# EAGLE board SSTuino_Evo (EAGLE 9.6.2)
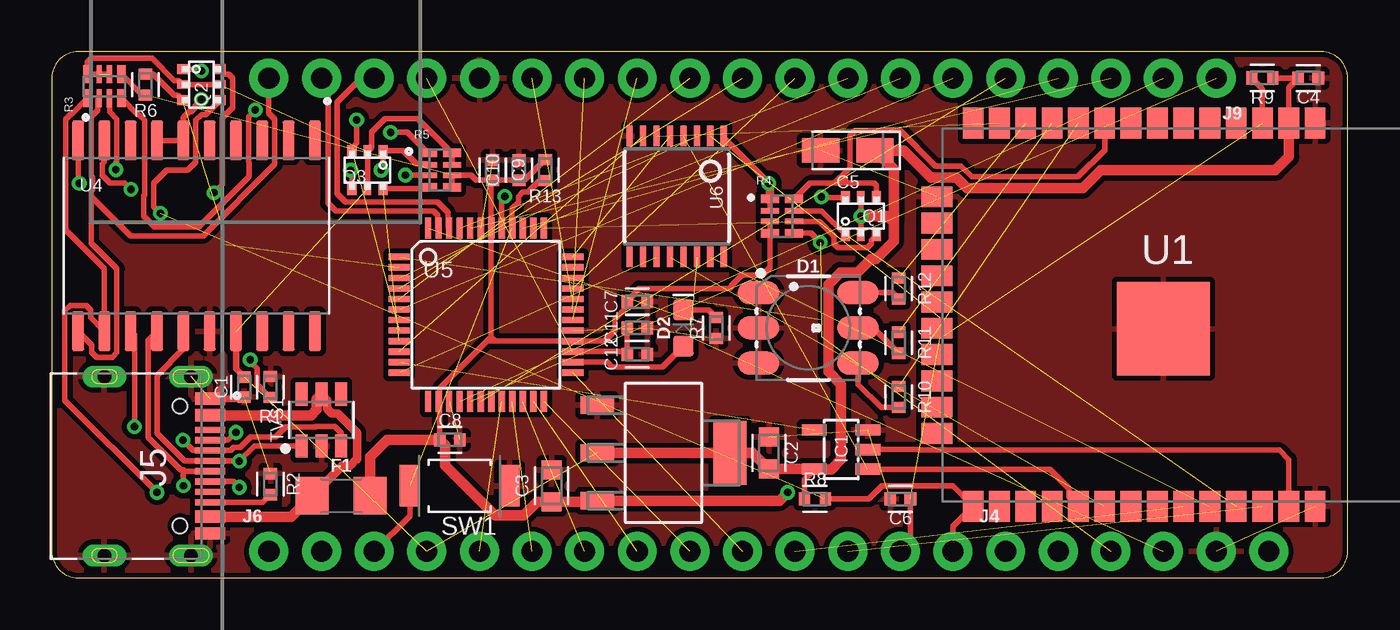
[diagram p0: board, top side]
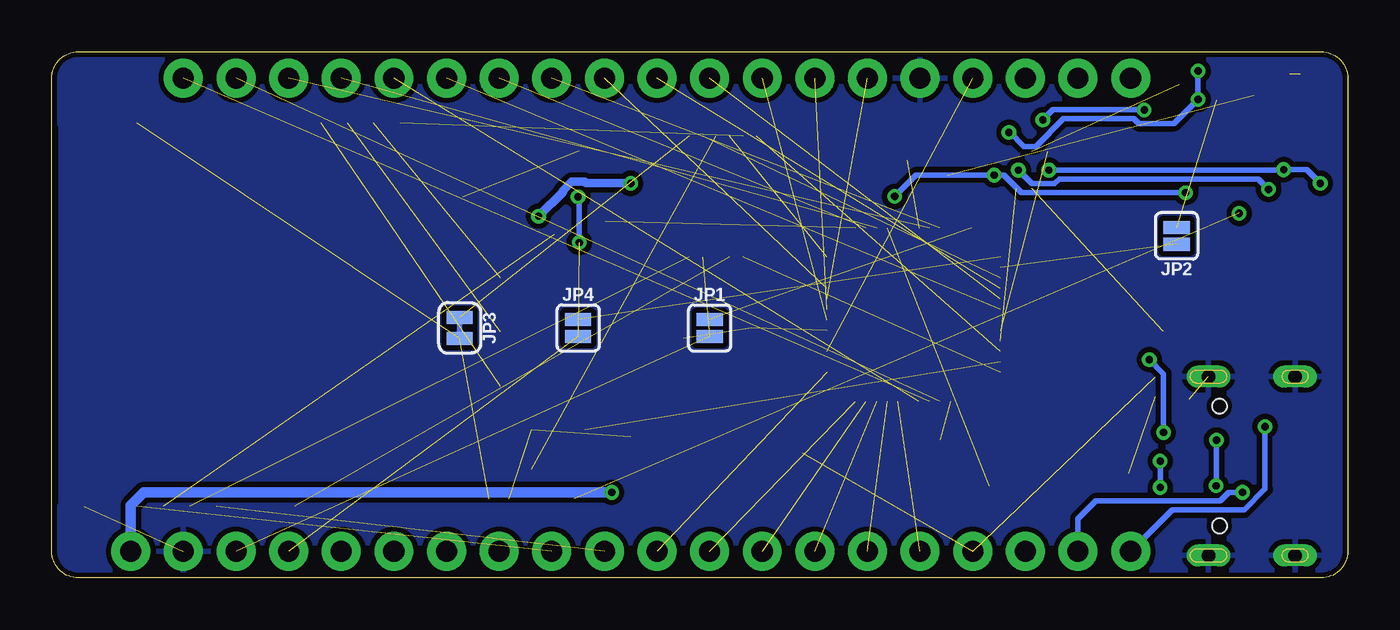
[diagram p1: board, bottom side, seen from below]

Size 62.55 x 25.4 mm. Coordinates in mm from the lower left corner, seen from the top.
Outline: 0,24.13 0,1.27 arc90 1.27,0 61.28,0 arc90 62.55,1.27 62.55,24.13 arc90 61.28,25.4 1.27,25.4 arc90 0,24.13
Copper layers (1*16): Top 0.035mm / dielectric 1.5mm / Bottom 0.035mm
Design rules "SparkFun-2-Layer-General-JLCPCB": minimum track width 7mil, minimum drill 0.3mm, track to track 7mil, track to pad 7mil, pad to pad 7mil, via to via 7mil, smd to smd 7mil, copper to edge 7mil, drill to drill 7mil, minimum pad ring 7mil, minimum via ring 7mil, stop-mask expansion 3mil, vias tented up to drill 25mil, thermal gap 10mil
Net classes: 0 default: width 0.254 mm, drill 0.35 mm; 1 differential: width 0.254 mm

## Footprints (pad centres in the part's own frame; a part is rotated, then mirrored left to right if it is on the bottom)
ARDUINO_R3 = drill 1.016 pad 1.93: 3.3V 2.54,-24.13; 5V 5.08,-24.13; A0 17.78,-24.13; A1 20.32,-24.13; A2 22.86,-24.13; A3 25.4,-24.13; A4 27.94,-24.13; A5 30.48,-24.13; AREF -9.144,24.13; D0 30.48,24.13; D1 27.94,24.13; D2 25.4,24.13; D3 22.86,24.13; D4 20.32,24.13; D5 17.78,24.13; D6 15.24,24.13; D7 12.7,24.13; D8 8.636,24.13; D9 6.096,24.13; D10 3.556,24.13; D11 1.016,24.13; D12 -1.524,24.13; D13 -4.064,24.13; GND@1 7.62,-24.13; GND@2 10.16,-24.13; GND@3 -6.604,24.13; GND@4 33.16,-1.32; IOREF -2.54,-24.13; MISO 30.62,3.76; MOSI 33.16,1.22; NC -5.08,-24.13; RESET@1 0,-24.13; RESET@2 30.62,-1.32; SCK 30.62,1.22; SCL -14.224,24.13; SDA -11.684,24.13; VCC 33.16,3.76; VIN 12.7,-24.13 | hole 3.175: -17.78,24.13; 33.02,8.89; 33.02,-19.05; -19.05,-24.13
CAPC1005X60 = smd 0.56 x 0.629: 1 -0.485,0; 2 0.485,0
CAPC1608X85 = smd 0.921 x 0.97: 1 -0.775,0; 2 0.775,0
CAPMP3216X180N = smd 1.796 x 1.189: 1 -1.31,0; 2 1.31,0
LED-TRICOLOR-5050 = smd 2 x 1.1: 1 2.4,-1.7; 2 2.4,0; 3 2.4,1.7; 4 -2.4,1.7; 5 -2.4,0; 6 -2.4,-1.7
LED-0603 = smd 1 x 1: A -0.877,0; C 0.877,0
1206 = smd 1.6 x 1.8: 1 -1.4,0; 2 1.4,0
SOT23-5L = smd 0.55 x 1.2: 1 -0.95,-1.3; 2 0,-1.3; 3 0.95,-1.3; 4 0.95,1.3; 5 -0.95,1.3
1X06_NO_SILK = drill 1.016 pad 1.88: 1 0,0; 2 2.54,0; 3 5.08,0; 4 7.62,0; 5 10.16,0; 6 12.7,0
HRO_TYPE-C-31-M-12 = smd 0.6 x 1.45: A1B12 -3.25,5.095; A4B9 -2.45,5.095; B1A12 3.25,5.095; B4A9 2.45,5.095 | smd 0.3 x 1.45: A5 -1.25,5.095; A6 -0.25,5.095; A7 0.25,5.095; A8 1.25,5.095; B5 1.75,5.095; B6 0.75,5.095; B7 -0.75,5.095; B8 -1.75,5.095 | drill 0.65 pad 1.05 long: S1 -4.32,4.18; S2 4.32,4.18; S3 -4.32,0; S4 4.32,0 | hole 0.7: -2.89,3.65; 2.89,3.65
1X14_NO_SILK = drill 1.016 pad 1.88: 1 0,0; 2 2.54,0; 3 5.08,0; 4 7.62,0; 5 10.16,0; 6 12.7,0; 7 15.24,0; 8 17.78,0; 9 20.32,0; 10 22.86,0; 11 25.4,0; 12 27.94,0; 13 30.48,0; 14 33.02,0
1X19_NO_SILK = drill 1.016 pad 1.88: 1 0,0; 2 2.54,0; 3 5.08,0; 4 7.62,0; 5 10.16,0; 6 12.7,0; 7 15.24,0; 8 17.78,0; 9 20.32,0; 10 22.86,0; 11 25.4,0; 12 27.94,0; 13 30.48,0; 14 33.02,0; 15 35.56,0; 16 38.1,0; 17 40.64,0; 18 43.18,0; 19 45.72,0
SMT-JUMPER_2_NO_SILK = smd 0.635 x 1.27: 1 -0.406,0; 2 0.406,0
SMT-JUMPER_2_NC_TRACE_SILK = smd 0.635 x 1.27: 1 -0.508,0; 2 0.508,0
ARDUINO-TRANSISTORS_SOT363 = smd 0.5 x 0.6: 1 -0.75,-0.9; 3 0.75,-0.9; 4 0.75,0.9; 6 -0.75,0.9 | smd 0.4 x 0.6: 2 0,-0.9; 5 0,0.9
RESC1005X40 = smd 0.535 x 0.644: 1 -0.507,0; 2 0.507,0
RESPACK_4X0402 = smd 0.87 x 0.41: 1 -0.58,0.825; 4 -0.58,-0.825; 5 0.58,-0.825; 8 0.58,0.825 | smd 0.87 x 0.26: 2 -0.58,0.25; 3 -0.58,-0.25; 6 0.58,-0.25; 7 0.58,0.25
SW2-2.6-3.9X2.9X1.5+0.4MM = smd 1 x 2: 1 -2.4,0; 2 2.4,0
SOT95P280X110-6N = smd 1.119 x 0.584: 1 -1.246,0.95; 2 -1.246,0; 3 -1.246,-0.95; 4 1.246,-0.95; 5 1.246,0; 6 1.246,0.95
ESP-32S = smd 1.5 x 1: 1 -9.25,7; 2 -9.25,5.73; 3 -9.25,4.46; 4 -9.25,3.19; 5 -9.25,1.92; 6 -9.25,0.65; 7 -9.25,-0.62; 8 -9.25,-1.89; 9 -9.25,-3.16; 10 -9.25,-4.43; 11 -9.25,-5.7; 12 -9.25,-6.97; 13 -9.25,-8.24; 14 -9.25,-9.51; 25 9.25,-9.51; 26 9.25,-8.24; 27 9.25,-6.97; 28 9.25,-5.7; 29 9.25,-4.43; 30 9.25,-3.16; 31 9.25,-1.89; 32 9.25,-0.62; 33 9.25,0.65; 34 9.25,1.92; 35 9.25,3.19; 36 9.25,4.46; 37 9.25,5.73; 38 9.25,7 | smd 1 x 1.5: 15 -5.7,-11.25; 16 -4.43,-11.25; 17 -3.16,-11.25; 18 -1.89,-11.25; 19 -0.62,-11.25; 20 0.65,-11.25; 21 1.92,-11.25; 22 3.19,-11.25; 23 4.46,-11.25; 24 5.73,-11.25 | smd 4.5 x 4.5: GND 0.68,-0.33
SOT230P696X180-4N = smd 1.6 x 0.838: 1 -3.2,2.311; 2 -3.2,0; 3 -3.2,-2.311 | smd 1.6 x 3.099: 4 3.2,0
SOIC127P1030X265-20N = smd 1.9 x 0.6: 1 -4.605,5.715; 2 -4.605,4.445; 3 -4.605,3.175; 4 -4.605,1.905; 5 -4.605,0.635; 6 -4.605,-0.635; 7 -4.605,-1.905; 8 -4.605,-3.175; 9 -4.605,-4.445; 10 -4.605,-5.715; 11 4.605,-5.715; 12 4.605,-4.445; 13 4.605,-3.175; 14 4.605,-1.905; 15 4.605,-0.635; 16 4.605,0.635; 17 4.605,1.905; 18 4.605,3.175; 19 4.605,4.445; 20 4.605,5.715
TQFP48 = smd 1.016 x 0.305: 1 -4.191,2.794; 2 -4.191,2.286; 3 -4.191,1.778; 4 -4.191,1.27; 5 -4.191,0.762; 6 -4.191,0.254; 7 -4.191,-0.254; 8 -4.191,-0.762; 9 -4.191,-1.27; 10 -4.191,-1.778; 11 -4.191,-2.286; 12 -4.191,-2.794; 25 4.191,-2.794; 26 4.191,-2.286; 27 4.191,-1.778; 28 4.191,-1.27; 29 4.191,-0.762; 30 4.191,-0.254; 31 4.191,0.254; 32 4.191,0.762; 33 4.191,1.27; 34 4.191,1.778; 35 4.191,2.286; 36 4.191,2.794 | smd 0.305 x 1.016: 13 -2.794,-4.191; 14 -2.286,-4.191; 15 -1.778,-4.191; 16 -1.27,-4.191; 17 -0.762,-4.191; 18 -0.254,-4.191; 19 0.254,-4.191; 20 0.762,-4.191; 21 1.27,-4.191; 22 1.778,-4.191; 23 2.286,-4.191; 24 2.794,-4.191; 37 2.794,4.191; 38 2.286,4.191; 39 1.778,4.191; 40 1.27,4.191; 41 0.762,4.191; 42 0.254,4.191; 43 -0.254,4.191; 44 -0.762,4.191; 45 -1.27,4.191; 46 -1.778,4.191; 47 -2.286,4.191; 48 -2.794,4.191
TSSOP16 = smd 0.305 x 0.991: 1 -2.275,-2.918; 2 -1.625,-2.918; 3 -0.975,-2.918; 4 -0.325,-2.918; 5 0.325,-2.918; 6 0.975,-2.918; 7 1.625,-2.918; 8 2.275,-2.918; 9 2.275,2.918; 10 1.625,2.918; 11 0.975,2.918; 12 0.325,2.918; 13 -0.325,2.918; 14 -0.975,2.918; 15 -1.625,2.918; 16 -2.275,2.918

## Placement (x,y rotation side)
B1  ARDUINO_UNO_R3  [ARDUINO_R3]  41.27,11.43 0 top
C1  100n  [CAPC1005X60]  9.29,9.21 270 top
C2  10uF  [CAPC1608X85]  34.61,6.03 90 top
C3  10uF  [CAPC1608X85]  24.13,4.45 90 top
C4  0.1uF  [CAPC1005X60]  60.64,24.13 0 top
C5  100uF  [CAPMP3216X180N]  38.42,20.64 180 top
C6  1uF  [CAPC1005X60]  40.96,3.81 0 top
C7  0.1uF  [CAPC1005X60]  28.26,13.34 0 top
C8  0.1uF  [CAPC1005X60]  19.21,6.67 0 top
C9  0.1uF  [CAPC1005X60]  21.27,19.68 90 top
C10  4.7uF  [CAPC1005X60]  22.54,19.68 90 top
C11  0.1uF  [CAPC1005X60]  28.26,12.06 0 top
C12  4.7uF  [CAPC1005X60]  28.26,10.79 0 top
D1  [LED-TRICOLOR-5050]  36.51,12.06 180 top
D2  [LED-0603]  30.48,12.06 90 top
F1  6V/0.75A  [1206]  13.97,3.97 0 top
IC1  74AHC1G125  [SOT23-5L]  38.1,6.19 90 top
J4  [1X06_NO_SILK]  46.04,1.27 0 top
J5  TYPE-C-31-M-12  [HRO_TYPE-C-31-M-12]  2.54,5.4 270 top
J6  [1X14_NO_SILK]  10.48,1.27 0 top
J9  [1X19_NO_SILK]  56.2,24.13 180 top
JP1  [SMT-JUMPER_2_NO_SILK]  30.8,12.06 270 bottom
JP2  [SMT-JUMPER_2_NO_SILK]  8.26,16.51 90 bottom
JP3  JUMPER-SMT_2_NC_TRACE_SILK  [SMT-JUMPER_2_NC_TRACE_SILK]  42.86,12.06 270 bottom
JP4  [SMT-JUMPER_2_NO_SILK]  37.15,12.06 270 bottom
Q1  BSS138PS  [ARDUINO-TRANSISTORS_SOT363]  39.05,17.46 0 top
Q2  BSS138PS  [ARDUINO-TRANSISTORS_SOT363]  7.22,23.81 270 top
Q3  BSS138PS  [ARDUINO-TRANSISTORS_SOT363]  15.24,19.68 180 top
R1  5.1k  [RESC1005X40]  10.56,9.21 90 top
R2  5.1k  [RESC1005X40]  10.56,4.52 270 top
R3  4.7k  [RESPACK_4X0402]  2.54,23.73 90 top
R4  4.7k  [RESPACK_4X0402]  35.24,17.46 0 top
R5  4.7k  [RESPACK_4X0402]  18.73,19.68 0 top
R6  10k  [RESC1005X40]  4.52,23.81 90 top
R7  1k  [RESC1005X40]  32.07,12.06 270 top
R8  10k  [RESC1005X40]  36.83,3.81 180 top
R9  12k  [RESC1005X40]  58.42,24.13 0 top
R10  1k  [RESC1005X40]  40.88,8.73 270 top
R11  1k  [RESC1005X40]  40.88,11.35 270 top
R12  1k  [RESC1005X40]  40.88,13.97 270 top
R13  100k  [RESC1005X40]  23.81,19.68 90 top
SW1  SKRKAEE020  [SW2-2.6-3.9X2.9X1.5+0.4MM]  19.68,4.45 180 top
TVS1  TPUSBLC6-2SC6  [SOT95P280X110-6N]  13.02,7.62 90 top
U1  ESP-32S  [ESP-32S]  53.98,12.7 270 top
U3  AMS1117-3.3  [SOT230P696X180-4N]  29.53,6.03 0 top
U4  ATSAMD11D14A-SSNT  [SOIC127P1030X265-20N]  6.99,16.51 270 top
U5  MEGA4809  [TQFP48]  20.95,12.7 0 top
U6  [TSSOP16]  30.16,18.41 180 top

## Library data of the parts
B1 = SparkFun-Boards
C1-C12 = Capacitor; CATEGORY: Capacitor
D1 = D3ltav's Custom; PROD_ID: DIO-10298
D2 = SparkFun-LED
F1 = SparkFun-Fuses; LCSC_PART: C99563; PROD_ID: RES-11150
IC1 = adafruit; LCSC_PART: C124295
J4 = SparkFun-Connectors; PROD_ID: CONN-08437
J5 = D3ltav's Custom; AVAILABILITY: No availability data; DESCRIPTION: USB Connectors 24 Receptacle 1 8.94*7.3mm RoHS; LCSC_PART: C165948; MF: HRO Electronics Co., Ltd.; MP: TYPE-C-31-M-12; PACKAGE: Package; PRICE: None
J6 J9 = SparkFun-Connectors
JP1-JP4 = SparkFun-Jumpers
Q1-Q3 = D3ltav's Custom; CODE-ARDUINO: 2323; DATASHEET: https://assets.nexperia.com/documents/data-sheet/BSS138PS.pdf; DISTRIBUTOR-LINK: http://www.digikey.com/product-detail/en/nxp-semiconductors/BSS138PS,115/568-8393-1-ND/2763927; DISTRIBUTOR-PN: 568-8393-1-ND; LCSC_PART: C193381; MANUFACTURER: NXP; MANUFACTURER-PN: BSS138PS,115
R1 R2 R6-R13 = Resistor; CATEGORY: Resistor; SUB-CATEGORY: Fixed
R3-R5 = D3ltav's Custom; LCSC_PART: C1980
SW1 = D3ltav's Custom; LCSC_PART: C115357; MPN: SKRKAEE020
TVS1 = D3ltav's Custom; LCSC_PART: C558442
U1 = esp32
U3 = D3ltav's Custom; LCSC_PART: C6186; MPN: LM1117MP-3.3; OC_FARNELL: 9778195; OC_NEWARK: 41K3470; PACKAGE: SOT223-3; SUPPLIER: NationalSemiconductor
U4 = D3ltav's Custom; AVAILABILITY: In Stock; DESCRIPTION: ARM® Cortex®-M0+ SAM D11D Microcontroller IC 32-Bit 48MHz 16KB (16K x 8) FLASH 20-SOIC; LCSC_PART: C2053599; MF: Microchip; MP: ATSAMD11D14A-SSNT; PACKAGE: SOIC-20 Microchip; PRICE: None
U5 = microwavemont_ATMEGA4809; LCSC_PART: C189475
U6 = D3ltav's Custom; LCSC_PART: C43181

## Nets
3.3V: C1.1 C2.1 C4.1 C5.1 IC1.5 J6.4 Q1.2 Q1.5 Q2.2 Q2.5 Q3.2 Q3.5 R3.6 R3.7 R3.8 R4.1 R4.2 R5.7 R5.8 R8.2 R9.2 U1.2 U3.2 U3.4 U4.17 U6.1
5V: C3.1 C7.1 C8.1 C9.1 C10.1 F1.2 J4.6 R3.5 R4.3 R4.4 R5.5 R5.6 R6.1 R13.2 U3.3 U5.14 U5.28 U5.42
BLU: D1.6 R12.2
CC1: J5.A5 R1.1
CC2: J5.B5 R2.2
D_N [differential]: J5.A7 J5.B7 TVS1.3 U4.14
D_P [differential]: J5.A6 J5.B6 TVS1.1 U4.15
ESP_ACK: Q1.4 R4.8 U1.9
ESP_BLUE: R12.1 U1.12
ESP_CS: IC1.1 U1.29 U6.4
ESP_EN: C6.2 J6.13 JP3.2 R9.1 U1.3
ESP_GREEN: R10.1 U1.10
ESP_IO0: J6.14 Q2.4 R8.1 U1.25
ESP_MISO: IC1.2 U1.37
ESP_MOSI: U1.13 U6.6
ESP_RED: R11.1 U1.11
ESP_RX: U1.34 U6.15
ESP_RX_5V: J4.4 JP1.2 U6.14
ESP_SCK: U1.30 U6.12
ESP_SCL: J6.12 U1.36
ESP_SDA: J6.11 U1.33
ESP_TX: Q1.1 R4.7 U1.35
ESP_TX_5V: J4.3 JP4.2 Q1.6 R4.5
GND: C1.2 C2.2 C3.2 C4.2 C5.2 C6.1 C7.2 C8.2 C9.2 C10.2 C11.2 C12.2 D1.1 D1.2 D1.3 IC1.3 J4.5 J5.A1B12 J5.B1A12 J5.S1 J5.S2 J5.S3 J5.S4 J9.15 R1.2 R2.1 R7.2 SW1.1 TVS1.2 U1.1 U1.15 U1.38 U1.GND U3.1 U4.16 U5.15 U5.29 U5.43 U6.8
GRN: D1.4 R10.2
IO0_5V: JP2.2 Q2.3 R6.2
N$2: D2.C R7.1
N$4: JP3.1 U6.2
PA0_D2: J9.3 U5.44
PA1_D7: J9.8 U5.45
PA2_D20_SDA: J9.17 U5.46
PA3_D21_SCL: J9.18 U5.47
PA4_D24_TX2: JP1.1 U5.48
PA5_D23_RX2: JP4.1 U5.1
PA6_D28: JP2.1 U5.2
PA7_D29: U5.3 U6.3
PB0_D9~: J9.10 U5.4
PB1_D10~: J9.11 U5.5
PB2_D5~: J9.6 U5.6
PB3_D30: U5.7
PB4_D27_TX0: Q3.3 R3.4 U5.8
PB5_D26_RX0: Q3.6 R5.4 U5.9
PC0_MOSI: U5.10 U6.7
PC1_MISO: IC1.4 U5.11
PC2_SCK: U5.12 U6.11
PC3_D22: U5.13
PC4_D1_TX1: J9.2 U5.16
PC5_D0_RX1: J9.1 U5.17
PC6_D4: J9.5 U5.18
PC7_D31: U5.19
PD0_A0: J6.5 U5.20
PD1_A1: J6.6 U5.21
PD2_A2: J6.7 U5.22
PD3_A3: J6.8 U5.23
PD4_A4: J6.9 U5.24
PD5_A5: J6.10 U5.25
PD6_A6: D2.A U5.26
PD7_A7_AREF: C11.1 C12.1 J9.16 U5.27
PE0_D11: J9.12 U5.30
PE1_D12: J9.13 U5.31
PE2_D13: J9.14 U5.32
PE3_D8: J9.9 U5.33
PF0_D37: U5.34
PF1_D38: U5.35
PF2_D35_A12: U5.36 U6.5
PF3_D36_A13: Q1.3 R4.6 U5.37
PF4_D6~: J9.7 U5.38
PF5_D3~: J9.4 U5.39
PF6_RST: J6.3 R13.1 SW1.2 U5.40
RED: D1.5 R11.2
RESETN: J9.19 R3.2 U4.11
RX_D11: Q3.4 R3.3 U4.10
SWCLK: J6.2 R3.1 U4.12
SWDIO: J6.1 U4.13
TX_D11: Q3.1 R5.2 U4.9
UPDI_3V3: Q2.1 R5.1 U4.6 U4.7
UPDI_5V: Q2.6 R5.3 U5.41
V_USB: F1.1 J5.A4B9 J5.B4A9 TVS1.5

## Tracks (layer width: path | path; a pad name or v marks a point on that pad's centre or on a via)
3.3V  (via drill 0.35)  (5 unrouted)
  Top 0.254: R8.2 36.32,4.76 IC1.5 | Q1.2 v39.05,17.46 Q1.5 | R4.1 R4.2 | U1.2 59.7,23.68 C4.1 R9.2 | R3.6 R3.8 1.72,24.89 1.91,25.08 4.84,25.08 5.91,24.01 6.13,24.01 Q2.2 Q2.5 | Q3.5 Q3.2 15.44,20.78 15.44,21.52 16.08,22.17 17.65,22.17 R5.8 R5.7 | U6.1 32.44,21.22 v34.61,19.05
  Top 0.305: C1.1 8.89,10.09 U4.17
  Top 0.406: v34.61,19.05 34.66,19 R4.1
  Top 0.508: U3.2 U3.4 33.83,6.03 33.94,5.92 33.95,5.92 C2.1 36.78,5.26 IC1.5 37.63,5.24 38.1,5.71 38.1,9.34 37.48,9.96 37.48,14.17 38.06,14.75 38.88,14.75 39.53,15.4 39.78,15.4 40.64,16.25 40.64,17.14 | 40.64,17.14 40.32,17.46 v39.05,17.46 | 40.64,17.14 40.64,19.73 C5.1 41.12,20.64 42.42,19.33 43.65,19.33 44.18,18.81 49.76,18.81 50.64,19.68 59.05,19.68 59.7,20.34 U1.2
  Bottom 0.406: v39.05,17.46 37.88,18.63 37.88,18.7 37.45,19.13 36.84,19.13 36.77,19.05 v34.61,19.05
5V  (via drill 0.35)  (1 unrouted)
  Top 0.254: C8.1 18.72,7.87 18.72,7.88 18.72,8.46 U5.14 18.72,8.56 18.72,9.14 21.01,11.43 | 21.01,11.43 21.41,11.43 | 21.41,11.43 U5.28 26.67,11.43 27.19,11.95 27.19,12.51 27.77,13.09 C7.1 28.16,13.72 28.16,13.78 28.35,13.97 32.7,13.97 32.81,14.07 32.81,14.12 33.31,14.62 34.3,14.62 34.66,14.98 R4.4 R4.3 | 21.21,11.63 U5.42 21.21,19.14 C9.1 | 21.21,11.63 21.01,11.43 | 21.41,11.43 21.21,11.63 | R3.5 4.37,23.3 R6.1 | C9.1 C10.1 22.82,19.2 23.36,19.75 23.37,19.75 R13.2 | R5.5 R5.6 19.32,19.45 20.24,19.45 20.49,19.2 C9.1
  Top 0.508: F1.2 15.37,5.84 16.19,6.67 C8.1 18.98,6.41 18.98,5.44 21.41,3.01 22.76,3.01 23.42,3.67 C3.1 26.28,3.67 U3.3 35.12,3.72 v35.52,4.13
  Bottom 0.508: v35.52,4.13 58.1,4.13 58.74,3.49 J4.6
BLU
  Top 0.254: D1.6 40.58,13.77 R12.2
CC1  (via drill 0.35)
  Top 0.254: R1.1 10.11,9.14 9.91,9.35 9.91,10.1 9.57,10.43 v9.57,10.54 | v8.89,7.02 8.52,6.65 J5.A5
  Bottom 0.254: v9.57,10.54 8.89,9.85 v8.89,7.02
CC2
  Top 0.254: J5.B5 10.19,3.65 R2.2
D_N  (via drill 0.35)
  Top 0.254: J5.A7 6.4,5.15 | 6.4,5.15 6.33,5.22 6.22,5.22 4.65,6.79 4.65,11.47 U4.14 | v6.33,6.65 6.61,6.37 6.78,6.19 6.79,6.19 6.83,6.15 J5.B7 8.63,6.15 8.78,6.29 9.1,6.29 9.61,6.81 10.79,6.81 11.28,7.29 12.74,7.29 12.76,7.3 13.65,7.3 13.97,6.99 TVS1.3 | v6.35,4.45 6.35,5.1 6.4,5.15
  Bottom 0.254: v6.33,6.65 6.33,4.46 v6.35,4.45
D_P  (via drill 0.35)
  Top 0.254: U4.15 6.35,11.05 5.08,9.78 5.08,6.97 6.4,5.65 J5.A6 9.04,5.65 v9.05,5.64 9.79,6.37 TVS1.1 | J5.B6 8.77,4.65 v9.05,4.37
  Bottom 0.254: v9.05,5.64 v9.05,4.37
ESP_ACK
  Top 0.254: Q1.4 39.8,18.93 39.69,19.05 38.42,19.05 | R4.8 36.59,19.05 37.78,19.05 | 38.42,19.05 37.78,19.05 | U1.9 50.81,20.65 49.53,19.37 44.41,19.37 43.88,19.89 42.66,19.89 40.96,21.59 38.76,21.59 38.52,21.36 38.52,19.79 38.1,19.37 | 38.1,19.37 37.78,19.05 | 38.42,19.05 38.1,19.37
ESP_BLUE  (1 unrouted)
ESP_CS  (1 unrouted)
  Top 0.254: U1.29 49.08,3.92 49.08,4.33 48.16,5.24 IC1.1
ESP_EN  (2 unrouted)
  Top 0.254: C6.2 41.44,1.75 J6.13 | R9.1 58.35,23.69 58.35,23.68 58.44,23.6 U1.3
ESP_GREEN  (1 unrouted)
ESP_IO0  (via drill 0.35)  (1 unrouted)
  Top 0.254: J6.14 43.5,2.48 U1.25 43.49,4.43 40.07,4.43 39.45,3.81 R8.1 | Q2.4 7.43,22.37 7.24,22.37 6.96,22.09 6.96,20.08 6.56,19.68 5.54,19.68 4.91,19.05 4.91,17.93 v5.24,17.6
ESP_MISO
  Top 0.254: IC1.2 41.82,6.19 41.85,6.17 59.24,6.17 59.7,5.7 U1.37
ESP_MOSI  (1 unrouted)
ESP_RED  (1 unrouted)
ESP_RX  (1 unrouted)
ESP_RX_5V  (2 unrouted)
ESP_SCK  (1 unrouted)
ESP_SCL  (1 unrouted)
ESP_SDA  (1 unrouted)
ESP_TX  (1 unrouted)
  Top 0.254: Q1.1 37.15,17.71 R4.7
ESP_TX_5V  (via drill 0.35)  (2 unrouted)
  Top 0.254: Q1.6 37.18,18.36 v37.15,18.39 | v37.09,16.19 36.65,16.64 R4.5
  Bottom 0.254: v37.15,18.39 37.09,18.34 v37.09,16.19
GND  (10 unrouted)
  Top 0.305: C1.2 9.21,8.65 J5.A1B12 7.7,8.65 8.26,9.21
  pour Top (isolate 0.254): 0,25.4 62.23,25.4 62.23,0 0,0
  pour Bottom (isolate 0.254): 0,25.4 62.23,25.4 62.23,0 0,0
GRN
  Top 0.254: R10.2 40.04,8.22 38.91,9.35 D1.4
IO0_5V  (1 unrouted)
  Top 0.254: Q2.3 6.08,23.31 5.91,23.31 4.9,24.32 R6.2
N$2
  Top 0.254: D2.C 31.7,12.94 R7.1
N$4  (1 unrouted)
PA0_D2  (1 unrouted)
PA1_D7  (1 unrouted)
PA2_D20_SDA
  Top 0.254: U5.46 19.13,16.94 19.13,17.63 18.62,18.14 14.17,18.14 13.77,18.54 13.77,22.97 14.92,24.13 J9.17
PA3_D21_SCL
  Top 0.254: J9.18 13.34,23.81 13.34,18.1 13.73,17.7 18.44,17.7 18.62,17.52 18.62,16.94 U5.47
PA4_D24_TX2  (1 unrouted)
PA5_D23_RX2  (1 unrouted)
PA6_D28  (1 unrouted)
PA7_D29  (1 unrouted)
PB0_D9~  (1 unrouted)
PB1_D10~  (1 unrouted)
PB2_D5~  (1 unrouted)
PB4_D27_TX0  (via drill 0.35)  (1 unrouted)
  Top 0.254: R3.4 4.15,22.37 4.19,22.37 4.47,22.09 4.47,18.48 4.45,18.45 4.45,17.46 4.97,16.94 7.1,16.94 9.53,19.37 9.53,20.05 9.49,20.08 9.49,22.27 v9.82,22.6 | v14.71,22.12 14.71,20.98 14.49,20.75 Q3.3
  Bottom 0.254: v9.82,22.6 14.23,22.6 v14.71,22.12
PB5_D26_RX0  (1 unrouted)
  Top 0.254: R5.4 18.08,18.79 Q3.6
PC0_MOSI  (1 unrouted)
PC1_MISO  (1 unrouted)
PC2_SCK  (1 unrouted)
PC4_D1_TX1  (1 unrouted)
PC5_D0_RX1  (1 unrouted)
PC6_D4  (1 unrouted)
PD0_A0  (1 unrouted)
PD1_A1  (1 unrouted)
PD2_A2  (1 unrouted)
PD3_A3  (1 unrouted)
PD4_A4  (1 unrouted)
PD5_A5  (1 unrouted)
PD6_A6
  Top 0.254: U5.26 26.81,10.41 27.05,10.18 29.47,10.18 D2.A
PD7_A7_AREF  (1 unrouted)
  Top 0.254: C11.1 C12.1 27.65,10.92 U5.27
PE0_D11  (1 unrouted)
PE1_D12  (1 unrouted)
PE2_D13  (1 unrouted)
PE3_D8  (1 unrouted)
PF2_D35_A12  (1 unrouted)
PF3_D36_A13  (1 unrouted)
  Top 0.254: R4.6 37.04,17.21 37.75,16.51 37.75,16.15 37.94,15.96 39.37,15.96 39.56,16.15 39.56,16.32 Q1.3
PF4_D6~  (1 unrouted)
PF5_D3~  (1 unrouted)
PF6_RST  (1 unrouted)
  Top 0.254: J6.3 17.29,3 SW1.2 | U5.40 22.23,17.84 22.52,18.14 22.52,18.41 22.73,18.62 22.98,18.62 23.55,19.18 R13.1
RED
  Top 0.254: R11.2 40.44,11.29 40.43,11.29 39.65,12.06 D1.5
RESETN
  Top 0.254: J9.19 10.48,22.43 10.77,22.15 10.77,19.97 7.3,16.51 3.81,16.51 1.91,18.41 | R3.2 2.23,23.09 2.23,22.59 1.91,22.27 1.91,19.4 1.98,19.32 1.98,18.78 1.91,18.7 1.91,18.41 | 1.91,18.41 1.91,16.17 3.15,14.93 3.15,10.87 2.92,10.65 2.16,10.65 1.94,10.87 1.94,11.24 U4.11
RX_D11  (via drill 0.35)
  Top 0.254: R3.3 2.79,22.5 3.15,22.15 3.15,20.08 3.09,20.03 v3.09,19.71 | v1.32,19.05 1.27,19.1 U4.10 | Q3.4 14.49,19.62 v14.42,19.68
  Bottom 0.254: v1.32,19.05 1.98,19.71 v3.09,19.71 3.11,19.68 v14.42,19.68
SWCLK  (via drill 0.35)
  Top 0.254: R3.1 0.93,22.37 0.89,22.37 0.67,22.15 0.67,16.8 2.54,14.92 U4.12 1.88,12.57 1.88,12.94 1.65,13.16 0.89,13.16 0.64,12.91 0.64,8.57 v5.08,4.13
  Bottom 0.254: v5.08,4.13 5.74,4.13 6.16,3.71 12.17,3.71 13.02,2.86 J6.2
SWDIO  (via drill 0.35)
  Top 0.254: v3.99,7.3 3.99,11.72 U4.13
  Bottom 0.254: J6.1 8.47,3.28 5,3.28 3.99,4.29 v3.99,7.3
TX_D11  (via drill 0.35)
  Top 0.254: U4.9 2.54,20.09 2.43,19.98 2.43,19.43 2.82,19.05 3.52,19.05 v3.82,18.75 | v15.9,19.68 15.99,19.78 Q3.1 16.04,20.64 16.95,20.64 17.59,20 18.09,20 R5.2
  Bottom 0.254: v3.82,18.75 4.32,19.25 13.93,19.25 14.15,19.03 15.24,19.03 v15.9,19.68
UPDI_3V3  (via drill 0.35)
  Top 0.254: U4.7 U4.6 6.35,22.23 6.63,22.51 6.74,22.51 6.93,22.7 6.93,22.8 v7.22,23.1 | Q2.1 7.13,24.56 v7.22,24.47 | R5.1 17.15,21.51 v16.35,21.51
  Bottom 0.254: v7.22,24.47 v7.22,23.1 8.38,21.94 10.09,21.94 10.32,22.16 13.71,22.16 15.05,20.82 15.62,20.82 16.31,21.51 v16.35,21.51
UPDI_5V  (via drill 0.35)
  Top 0.254: Q2.6 8.37,24.32 8.54,24.32 8.73,24.13 8.73,22.7 8.22,22.2 8.22,19 v7.82,18.6 | v17.07,19.45 18.14,19.45 R5.3 | U5.41 21.72,18.27 v21.87,18.41
  Bottom 0.254: v7.82,18.6 15.74,18.6 16.59,19.45 v17.07,19.45 20.84,19.45 v21.87,18.41
V_USB
  Top 0.406: F1.1 14.03,5.43 14.42,5.43 14.7,5.71 14.73,5.71 14.73,7 13.81,7.93 13.52,7.93 13.29,8.15 13.29,8.59 TVS1.5
  Top 0.508: J5.B4A9 11.55,2.95 F1.1 | TVS1.5 12.79,8.64 12.79,8.13 12.51,7.85 J5.A4B9